# Allegro board KD_CH4_26_sli.brd
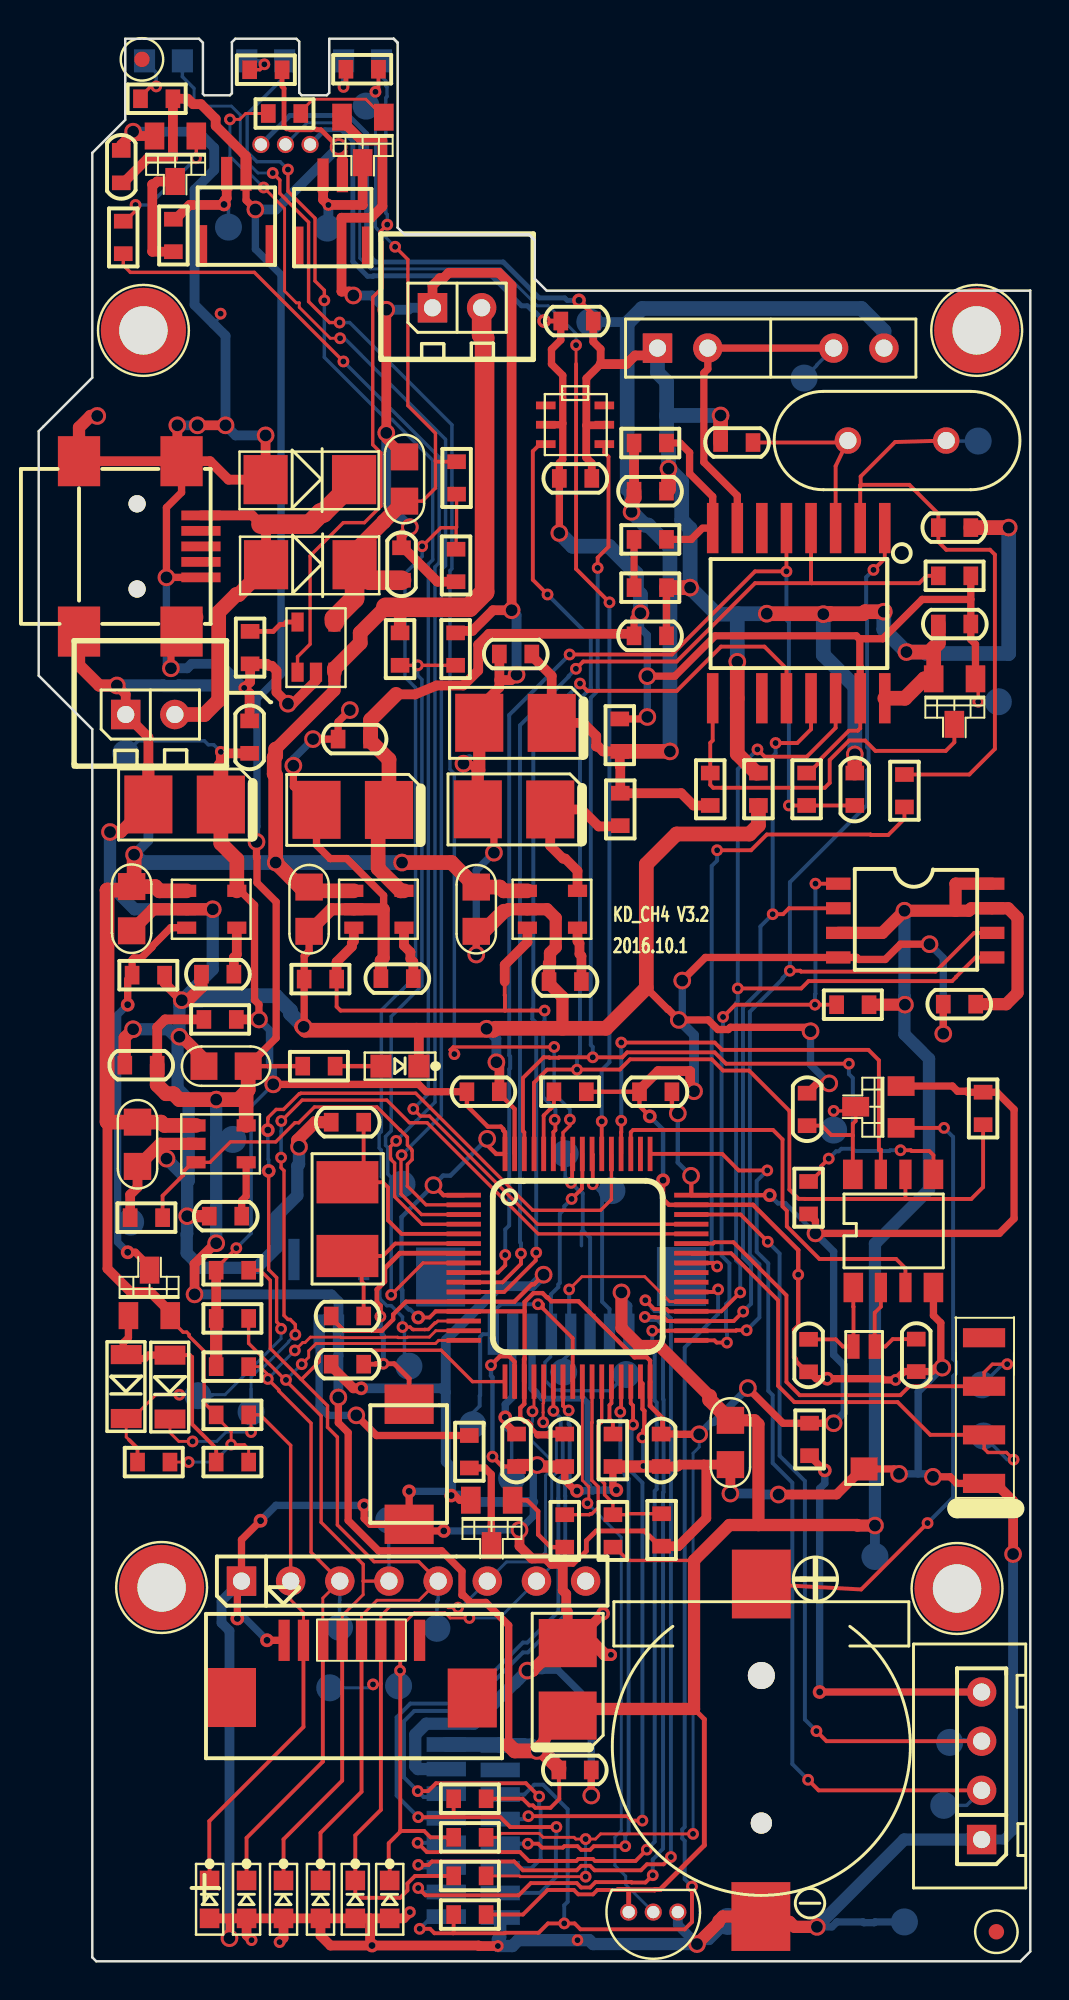
[diagram p0: board, top side]
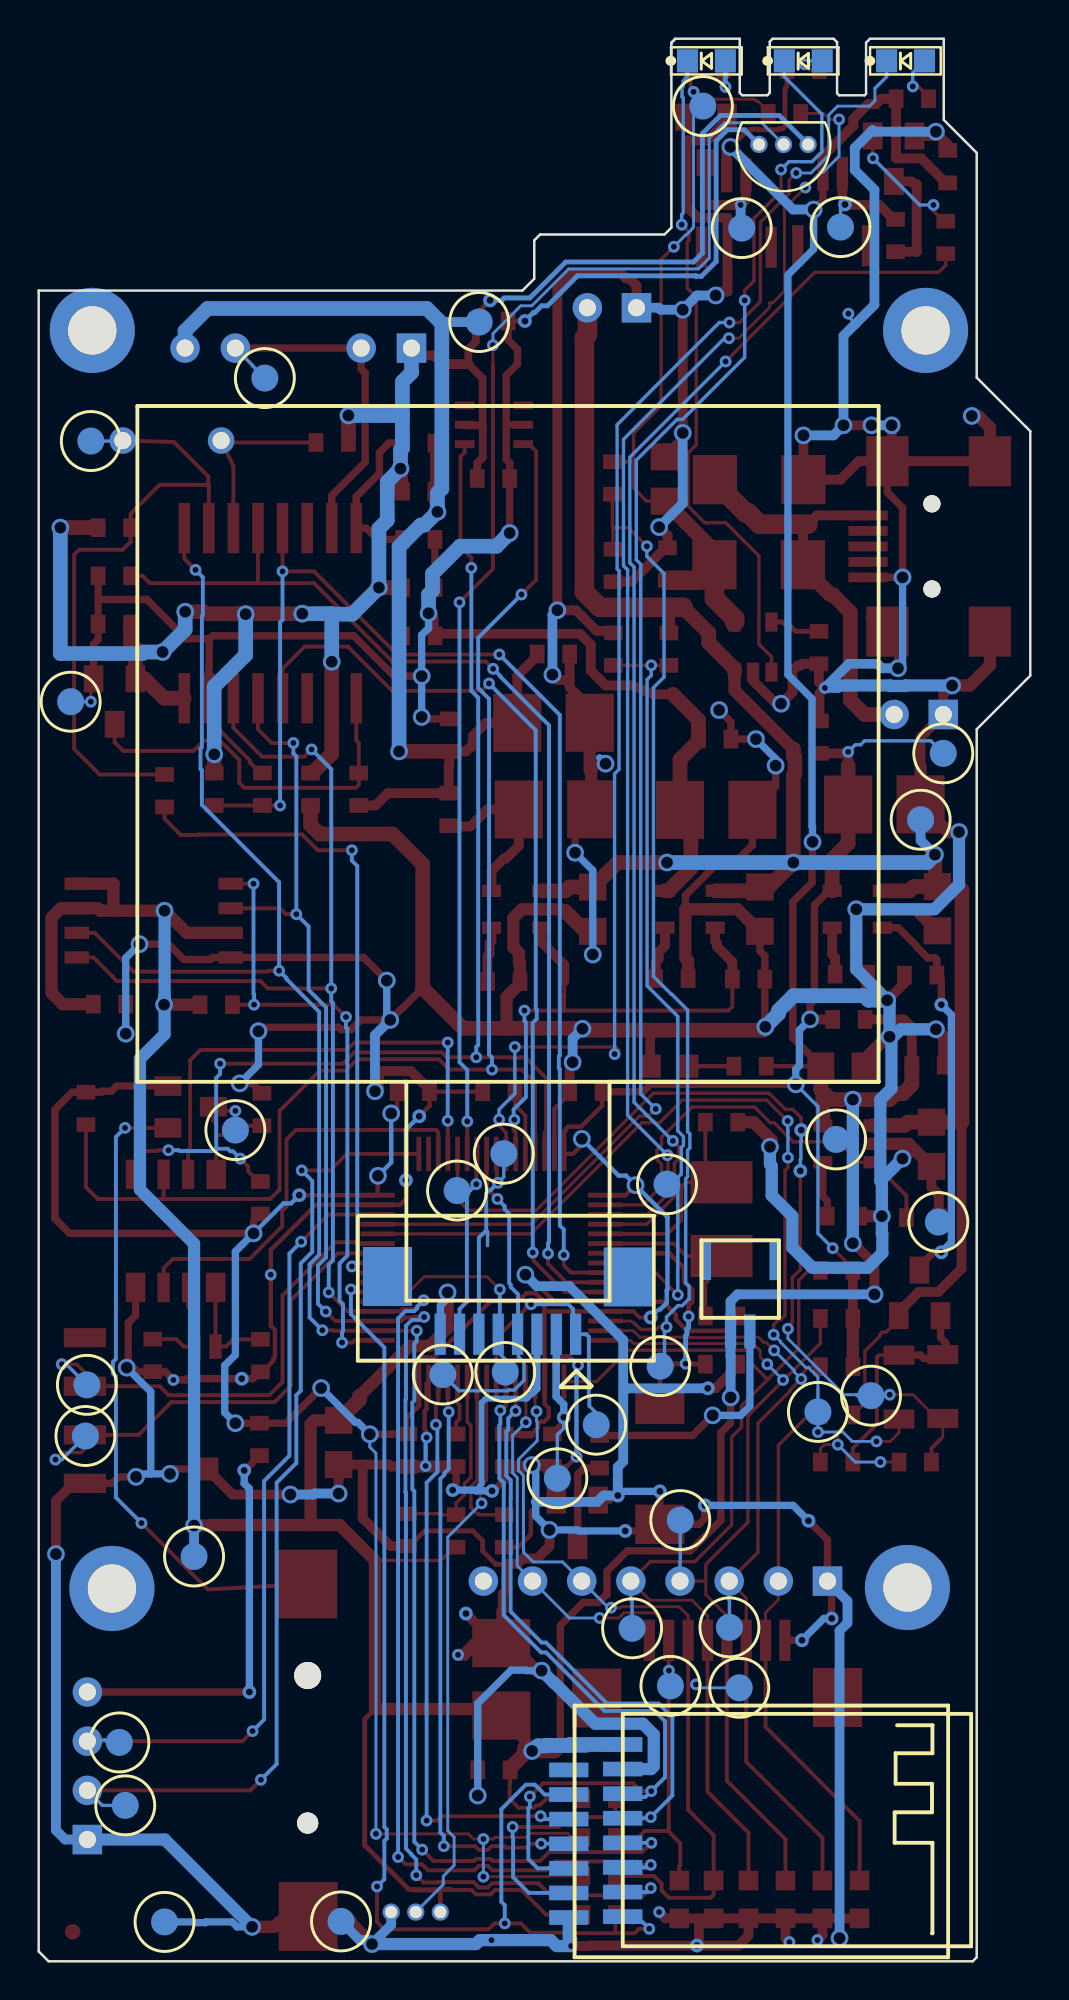
[diagram p1: board, bottom side, seen from below]

Outline 51.23 x 99.29 mm; copper layers: TOP, BOTTOM. Coordinates in mm from the lower left corner of the outline.
Outline path: 18.34,99.29 15.01,99.29 15.01,96.49 14.88,96.37 13.59,96.37 13.46,96.49 13.46,99.14 13.31,99.29 10.16,99.29 9.98,99.11 9.98,96.47 9.88,96.37 8.56,96.37 8.48,96.44 8.48,99.09 8.28,99.29 4.47,99.29 4.47,95.1 2.77,93.4 2.77,81.79 0,79.02 0,66.4 2.77,63.63 2.77,0.2 2.97,0 50.72,0 51.23,0.51 51.23,86.28 26.24,86.28 25.63,86.89 25.63,88.87 25.32,89.18 18.9,89.18 18.54,89.53 18.54,99.09 ; 18.34,99.29 18.54,99.09 ; 18.34,99.29 18.54,99.09

## Placement (name value [footprint] x y rotation side)
C2  0.1uF  [C0603]  18.75 72.16 270 top
C7  0.1uF  [C0603]  27.2 50.6 0 top
C16  10uF  [C0805]  22.61 54.33 270 top
C17  0.1uF  [C0603]  9.25 50.98 0 top
C20  0.1uF  [C0603]  9.65 38.48 0 top
C21  10uF  [C0805]  9.68 46.23 180 top
C22  10uF  [C0805]  5.11 42.19 270 top
C23  0.1uF  [C0603]  18.52 50.75 0 top
C25  10uF  [C0805]  13.97 54.33 270 top
C26  0.1uF  [C0603]  16.31 63.12 0 top
C27  0.1uF  [C0603]  10.9 63.22 270 top
C28  0.1uF  [C0603]  5.28 46.28 0 top
C29  0.1uF  [C0603]  47.32 69.06 0 top
C30  0.1uF  [C0603]  31.6 68.45 180 top
C31  NC/15pF  [C0603]  36.07 78.44 0 top
C32  NC/15pF  [C0603]  47.32 74.04 180 top
C33  0.1uF  [C0603]  42.16 60.53 270 top
C85  5pF  [C0603]  39.78 31.28 90 top
C86  5pF  [C0603]  45.34 31.29 90 top
C87  0.1uF  [C0603]  39.7 43.99 90 top
C88  15pF  [C0603]  15.95 43.33 0 top
C89  15pF  [C0603]  15.95 33.32 0 top
C90  0.1uF  [C0603]  15.95 30.84 0 top
C91  0.1uF  [C0603]  24.64 67.51 0 top
C92  10uF  [CAP-B]  24.52 59.48 0 top
C94  10uF  [C0805]  18.9 76.55 90 top
C95  10uF  [CAP-B]  16.18 59.46 0 top
C96  1uF  [C0603]  24.69 26.39 270 top
C97  10uF  [CAP-B]  7.5 59.73 0 top
C98  10uF  [CAP-B]  24.59 63.95 0 top
C99  10uF  [C0805]  4.8 54.36 270 top
C100  0.1uF  [C0603]  4.27 92.68 270 top
C101  10uF  [CAP-B]  27.32 14.6 270 top
C102  0.1uF  [C0603]  27.71 9.88 180 top
C103  0.1uF  [C0603]  27.18 26.39 270 top
C104  0.1uF  [C0603]  31.88 44.91 180 top
C105  0.1uF  [C0603]  32.16 26.39 270 top
C106  0.1uF  [C0603]  22.96 44.91 0 top
C107  0.1uF  [C0603]  47.57 49.43 180 top
C108  10uF  [C0805]  35.74 26.79 90 top
C109  0.1uF  [C0603]  27.74 76.58 180 top
C110  0.1uF  [C0603]  27.81 84.71 180 top
C111  0.1uF  [C0603]  31.6 75.92 180 top
D14  ESD5Z5VU  [SOD-523]  12.65 3.19 270 top
D22  MBR0520  [SOD-123]  4.52 29.68 90 top
D25  SMBJ5.0CA  [SMA]  14.01 76.52 180 top
D26  SS34  [SMA]  14.03 72.12 180 top
D27  BAT54C  [SOT23-3]  43.39 44.13 0 top
D30  ESD5Z5VU  [SOD-523]  10.74 3.19 270 top
D31  ESD5Z5VU  [SOD-523]  8.83 3.19 270 top
D32  ESD5Z5VU  [SOD-523]  14.56 3.19 270 top
D33  MBR0520  [SOD-123]  6.78 29.65 90 top
D34  ESD5Z5VU  [SOD-523]  16.36 3.19 270 top
D35  ESD5Z5VU  [SOD-523]  18.14 3.19 270 top
D_CHRG  LED  [LED0603]  17.86 98.15 90 bottom
D_LED1  LED  [LED0603]  7.58 98.15 90 bottom
D_LED2  LED  [LED0603]  12.86 98.15 90 bottom
D_PWR  LED  [LED0603]  19.79 46.23 270 top
FB1  FB/100M  [R0603]  30.05 59.49 90 top
FB2  FB/100M  [R0603]  37.19 60.53 90 top
H1  NC/mechanical _pad  [HOLE_2D5X4D5]  5.41 84.23 0 top
H2  NC/mechanical _pad  [HOLE_2D5X4D5]  47.45 19.25 0 top
H3  NC/mechanical _pad  [HOLE_2D5X4D5]  6.35 19.3 0 top
H4  NC/mechanical _pad  [HOLE_2D5X4D5]  48.46 84.23 0 top
H5  NC/mark  [MARK]  49.48 1.52 0 top
H6  NC/mark  [MARK]  5.33 98.22 0 top
JP_5V  -  [XH-2A]  4.5 64.39 0 top
JP_BAT1  -  [XH-2A]  20.35 85.39 0 top
JP_KEY  dpz_2d54_8p  [DPZ_2D54_8P]  10.48 19.63 0 top
JP_SEN  -  [MJC4]  37.82 83.31 0 top
JP_SWD  -  [XH-4A]  48.72 6.29 90 top
JS_BAT2  BAT  [CR1220_SOCKET_V1]  37.34 11.2 180 top
JS_BL  sh1d0_2p_smd_side  [SH1D0_2P_SMD_SIDE]  14.99 35.23 90 bottom
JS_BUZZER  sh1d0_2p_smd_side  [SH1D0_2P_SMD_SIDE]  15.19 89.53 270 top
JS_KEY  fpc_1d0_8p  [FPC_1D0_8P]  16.19 14.27 0 top
JS_LCD  FPC_1d0_8p  [DXDCG8448]  7.84 80.32 0 bottom
JS_MOTOR  sh1d0_2p_smd_side  [SH1D0_2P_SMD_SIDE]  10.21 89.61 270 top
JS_USART  NC/XH-4A  [HEADER4_SMD]  45.99 27.68 180 top
JS_USB  usb_mini_5p_smt  [USB_MINI_5P_SMT]  5.38 73.07 270 top
KS_REST  KEY_3x6x2d5_2p_SMD  [KEY_3X6X2D5_2P_SMD]  19.32 25.72 270 top
NOREF  -  []  39.67 48.31 0 top
Q1  CJ3407/PMOS  [SOT23-3]  5.73 34.51 270 top
Q10  AO3400A/NMOS  [SOT23-3]  7.05 93.1 90 top
Q11  AO3400A/NMOS  [SOT23-3]  16.74 94.07 90 top
Q12  AO3400A/NMOS  [SOT23-3]  23.39 22.64 90 top
R1  3.3K  [R0603]  16.71 97.71 0 top
R2  2K  [R0603]  10.92 67.84 90 top
R6  3.3K  [R0603]  14.48 46.23 0 top
R8  NC/0R  [R0603]  30.02 63.32 270 top
R9  0R  [R0603]  44.73 60.45 270 top
R10  3.3K  [R0603]  31.6 78.41 0 top
R11  0R  [R0603]  31.6 73.43 180 top
R12  3K  [R0603]  31.6 70.94 180 top
R13  10K  [R0603]  39.67 60.53 90 top
R14  33K  [R0603]  18.67 67.77 90 top
R15  33K  [R0603]  21.54 67.77 270 top
R16  10K  [R0603]  48.79 44.04 270 top
R17  10K  [R0603]  39.78 39.43 90 top
R18  10K  [R0603]  29.67 26.39 90 top
R35  10K  [R0603]  27.46 44.91 180 top
R36  10R  [R0603]  39.83 26.95 90 top
R37  33K  [R0603]  21.59 76.61 90 top
R38  33K  [R0603]  21.56 72.09 90 top
R122  10K  [R0603]  4.37 89.03 270 top
R123  10R  [R0603]  6.96 89.13 270 top
R124  10K  [R0603]  12.7 95.43 180 top
R125  3.3K  [R0603]  6.1 96.19 180 top
R126  3.3K  [R0603]  11.73 97.69 180 top
R203  10K  [R0603]  22.28 2.41 180 top
R206  10K  [R0603]  22.28 8.39 180 top
R207  10K  [R0603]  27.18 22.23 270 top
R208  100R  [R0603]  22.25 26.31 270 top
R209  10K  [R0603]  10.01 35.69 0 top
R210  10K  [R0603]  10.01 33.2 0 top
R211  10K  [R0603]  10.01 30.71 0 top
R212  10K  [R0603]  10.01 28.22 0 top
R213  10K  [R0603]  47.32 71.55 0 top
R214  10K  [R0603]  42.06 49.4 180 top
R215  0R  [R0603]  34.7 60.53 90 top
R216  10K  [R0603]  32.18 22.28 270 top
R217  NC/10K  [R0603]  29.67 22.23 90 top
R218  10K  [R0603]  5.56 38.4 0 top
R219  10K  [R0603]  14.55 50.72 0 top
R220  NC/0R  [R0603]  9.37 48.64 0 top
R221  10K  [R0603]  5.66 50.93 180 top
R222  10K  [R0603]  10.01 25.78 0 top
R223  10K  [R0603]  5.94 25.78 0 top
R224  10K  [R0603]  22.28 4.41 180 top
R225  10K  [R0603]  22.28 6.4 180 top
T1  NC/TEST  [TEST_55C_SMD]  16.92 95.81 180 bottom
T2  NC/TEST  [TEST_55C_SMD]  5.66 58.95 180 bottom
T3  NC/TEST  [TEST_55C_SMD]  28.47 84.66 180 bottom
T4  NC/TEST  [TEST_55C_SMD]  4.5 62.38 180 bottom
T5  NC/TEST  [TEST_55C_SMD]  49.58 65.05 180 bottom
T6  NC/TEST  [TEST_55C_SMD]  43.21 20.9 180 bottom
T7  NC/TEST  [TEST_55C_SMD]  4.75 38.18 180 bottom
T8  NC/TEST  [TEST_55C_SMD]  8.23 29.21 180 bottom
T9  NC/TEST  [TEST_55C_SMD]  18.77 40.13 180 bottom
T10  NC/TEST  [TEST_55C_SMD]  19.13 30.73 180 bottom
T11  NC/TEST  [TEST_55C_SMD]  46.76 8.05 180 bottom
T12  NC/TEST  [TEST_55C_SMD]  47.07 11.3 180 bottom
T13  NC/TEST  [TEST_55C_SMD]  44.73 2.03 180 bottom
T14  NC/TEST  [TEST_55C_SMD]  35.61 2.06 180 bottom
T15  NC/TEST  [TEST_55C_SMD]  48.82 27.13 180 bottom
T16  NC/TEST  [TEST_55C_SMD]  48.74 29.77 180 bottom
T17  NC/TEST  [TEST_55C_SMD]  39.55 81.76 180 bottom
T18  NC/TEST  [TEST_55C_SMD]  48.54 78.51 180 bottom
T19  NC/TEST  [TEST_55C_SMD]  20.57 17.2 180 bottom
T20  NC/TEST  [TEST_55C_SMD]  18.08 22.78 180 bottom
T21  NC/TEST  [TEST_55C_SMD]  15.54 17.25 180 bottom
T22  NC/TEST  [TEST_55C_SMD]  10.97 28.37 180 bottom
T23  NC/TEST  [TEST_55C_SMD]  9.8 89.56 180 bottom
T24  NC/TEST  [TEST_55C_SMD]  10.03 42.44 180 bottom
T25  NC/TEST  [TEST_55C_SMD]  14.91 89.51 180 bottom
T26  NC/TEST  [TEST_55C_SMD]  41.07 42.93 180 bottom
T27  NC/TEST  [TEST_55C_SMD]  22.43 27.71 180 bottom
T28  NC/TEST  [TEST_55C_SMD]  24.43 24.94 180 bottom
T29  NC/TEST  [TEST_55C_SMD]  30.35 30.3 180 bottom
T30  NC/TEST  [TEST_55C_SMD]  27.13 30.43 180 bottom
T31  NC/TEST  [TEST_55C_SMD]  27.2 41.71 180 bottom
T32  NC/TEST  [TEST_55C_SMD]  29.62 39.8 180 bottom
T33  NC/TEST  [TEST_55C_SMD]  15.04 14.12 180 bottom
T34  NC/TEST  [TEST_55C_SMD]  18.59 14.22 180 bottom
U1  TP4054-4.2  [SOT23-5]  14.33 67.87 0 top
U2  XC6219B282MR  [SOT23-5]  26.54 54.33 270 top
U4  RT9193-33GB  [SOT23-5]  8.94 54.33 270 top
U5  RT9193-33GB  [SOT23-5]  9.42 42.21 270 top
U15  PCF8563T  [SOP8]  42.24 35.05 0 top
U56  NC/REF3112AIDBZR  [SOT23-3]  47.31 65.06 90 top
U57  RT9193-33GB  [SOT23-5]  17.58 54.33 270 top
U58  STM32F103RB  [LQFP64]  27.84 35.82 0 top
U59  W25Q32SSIG  [SOIC_208MIL_8P]  45.29 53.75 0 top
U63  NC/SHT20  [SHT20]  27.72 79.41 0 top
U64  DS18B20  [TO92]  12.75 93.83 270 bottom
U67  AD7705  [SOIC16_WIDE]  39.27 69.62 270 top
U68  NC/DS18B20  [TO92]  31.75 2.54 270 top
U_24L01  NRF24L01 mode  [NRF24L01_MODE_V1]  21.06 12.78 270 bottom
U_ESP11  ESP8266-esp11  [ESP11]  23.55 13.21 270 bottom
Y1  8M  [CY5032_2P]  15.95 38.33 270 top
Y3  NC/2.4576M  [49S]  41.81 78.54 0 top
Y5  32.768KHz  [MC_146]  42.65 28.58 270 top

## Library data of the parts
C2 C7 C16 C17 C20-C23 C25-C33 C85-C92 C94-C111 = C
D14 D25 D26 D30-D32 D34 D35 = DIODE
D22 D33 = MBR0520
D27 = BAT54C
D_CHRG D_LED1 D_LED2 D_PWR = LED0603
FB1 FB2 = INDUCTOR_0
H1-H6 = PAD
JP_5V JP_BAT1 = BAT
JP_KEY = CON8
JP_SEN = CH4_Sensor_3
JP_SWD JS_USART = HEADER 4
JS_BAT2 = BATT
JS_BL = sh1d0_2p_smd_side_0
JS_BUZZER = buzzer_0
JS_KEY = CON8_0
JS_LCD = DXDCG8448
JS_MOTOR = MOTOR AC
JS_USB = MICRO_USB
KS_REST = SW PUSHBUTTON_0
Q1 = PMOS
Q10-Q12 = NMOS
R1 R2 R6 R8-R18 R35-R38 R122-R126 R203 R206-R225 = R
T1-T34 = TESTPONT
U1 = TP4054-4.2
U2 U4 U5 U57 = RT9193_1
U15 = PCF8563
U56 = REF31xx
U58 = STM32F103
U59 = W25Q32: Tolerance: ***; User Part Number: ***
U63 = SHT20
U64 U68 = DS18B20
U67 = AD7706_0
U_24L01 = NRF24L01_mode
U_ESP11 = 5962-9065001_0
Y1 Y3 = CRYSTAL
Y5 = MC_146

## Footprints (pads in the part's own frame, mm; a bottom-side part is the same pattern mirrored in y, then rotated)
49S
  round 1.372 hole 0.889: 1(0,0) 2(5.08,0)
C0603
  rect 0.762x0.965 smd: 1(-0.838,0) 2(0.838,0)
C0805
  rect 1.397x1.422 smd: 1(-1.143,0) 2(1.143,0)
CAP-B
  rect 2.489x2.997 smd: 1(1.913,0.005) 2(-1.831,0.01)
CR1220_SOCKET_V1
  round 1.397 hole 1.397 unplated: (0,-3.556)
  rect 3.048x3.556 smd: 1(0,-8.28) 2(0.025,8.89)
  round 1.092 hole 1.092: 3(0,4.064)
CY5032_2P
  rect 2.184x3.2 smd: 1(-1.905,0) 2(1.905,0)
DPZ_2D54_8P
  rect 1.524x1.524 hole 0.889: 1(0,0)
  round 1.524 hole 0.889: 2(2.54,0) 3(5.08,0) 4(7.62,0) 5(10.16,0) 6(12.7,0) 7(15.24,0) 8(17.78,0)
DXDCG8448
  rect 0.584x2.134 smd: 1(15.654,47.936) 2(16.654,47.936) 3(17.654,47.936) 4(18.654,47.936) 5(19.654,47.936) 6(20.654,47.936) 7(21.654,47.936) 8(22.654,47.936)
  rect 2.54x3.048 smd: 9(12.931,44.981) 10(25.375,44.956)
ESP11
  rect 0.762x2.032 smd: 1(2.055,-0.3) 2(3.325,-0.3) 3(4.595,-0.3) 4(5.865,-0.3) 5(7.135,-0.3) 6(8.405,-0.3) 7(9.675,-0.3) 8(10.945,-0.3)
FPC_1D0_8P
  rect 0.584x2.134 smd: 1(-3.515,2.306) 2(-2.515,2.306) 3(-1.515,2.306) 4(-0.515,2.306) 5(0.485,2.306) 6(1.485,2.306) 7(2.485,2.306) 8(3.485,2.306)
  rect 2.54x3.048 smd: 9(-6.238,-0.649) 10(6.206,-0.674)
HEADER4_SMD
  rect 2.184x0.991 smd: 1(-2.857,3) 2(-2.857,0.493) 3(-2.857,-2.017) 4(-2.857,-4.524)
HOLE_2D5X4D5
  round 4.4 hole 2.5: 1(0,0)
KEY_3X6X2D5_2P_SMD
  rect 2.032x2.54 smd: 1(-3.048,-0.178) 2(3.15,-0.178)
LED0603
  rect 1.194x1.092 smd: 1(0,-2.108) 2(0,-0.152)
LQFP64
  rect 1.778x0.254 smd: 1(-5.88,3.749) 2(-5.88,3.251) 3(-5.88,2.751) 4(-5.88,2.25) 5(-5.88,1.75) 6(-5.88,1.25) 7(-5.88,0.749) 8(-5.88,0.249) 9(-5.88,-0.249) 10(-5.88,-0.749) 11(-5.88,-1.25) 12(-5.88,-1.75) 13(-5.88,-2.25) 14(-5.88,-2.751) 15(-5.88,-3.251) 16(-5.88,-3.749) 33(5.88,-3.749) 34(5.88,-3.251) 35(5.88,-2.751) 36(5.88,-2.25) 37(5.88,-1.75) 38(5.88,-1.25) 39(5.88,-0.749) 40(5.88,-0.249) 41(5.88,0.249) 42(5.88,0.749) 43(5.88,1.25) 44(5.88,1.75) 45(5.88,2.25) 46(5.88,2.751) 47(5.88,3.251) 48(5.88,3.749)
  rect 0.254x1.778 smd: 17(-3.749,-5.88) 18(-3.251,-5.88) 19(-2.751,-5.88) 20(-2.25,-5.88) 21(-1.75,-5.88) 22(-1.25,-5.88) 23(-0.749,-5.88) 24(-0.249,-5.88) 25(0.249,-5.88) 26(0.749,-5.88) 27(1.25,-5.88) 28(1.75,-5.88) 29(2.25,-5.88) 30(2.751,-5.88) 31(3.251,-5.88) 32(3.749,-5.88) 49(3.749,5.88) 50(3.251,5.88) 51(2.751,5.88) 52(2.25,5.88) 53(1.75,5.88) 54(1.25,5.88) 55(0.749,5.88) 56(0.249,5.88) 57(-0.249,5.88) 58(-0.749,5.88) 59(-1.25,5.88) 60(-1.75,5.88) 61(-2.25,5.88) 62(-2.751,5.88) 63(-3.251,5.88) 64(-3.749,5.88)
MARK
  round 0.8 smd: 1(0,0)
MC_146
  rect 1.27x0.635 smd: 1(-3.173,0.55) 2(-3.173,-0.55)
  rect 1.194x1.397 smd: 3(3.15,0)
MJC4
  rect 1.524x1.524 hole 0.889: 1(-5.85,0)
  round 1.524 hole 0.889: 2(-3.25,0) 3(3.25,0) 4(5.85,0)
NRF24L01_MODE_V1
  rect 0.762x2.032 smd: 1(1.58,0) 2(2.85,0) 3(4.12,0) 4(5.39,0) 5(6.66,0) 6(7.93,0) 7(9.2,0) 8(10.47,0)
R0603
  rect 0.762x0.965 smd: 1(-0.838,0) 2(0.838,0)
SH1D0_2P_SMD_SIDE
  rect 2.134x0.584 smd: (1.013,1.798) (1.013,-1.801)
  rect 1.753x0.584 smd: 1(-2.7,-0.5) 2(-2.7,0.5)
SHT20
  rect 1.016x0.406 smd: 1(1.499,-1.06) 2(1.499,-0.06) 3(1.499,0.94) 4(-1.524,0.94) 5(-1.524,-0.06) 6(-1.524,-1.06)
SMA
  rect 2.286x2.54 smd: 1(2.286,0) 2(-2.286,0)
SOD-123
  rect 0.991x1.6 smd: 1(1.651,0) 2(-1.651,0)
SOD-523
  rect 1.016x1.016 smd: 1(0.978,0) 2(-0.978,0)
SOIC16_WIDE
  rect 2.6x0.6 smd: 1(-4.4,4.44) 2(-4.4,3.17) 3(-4.4,1.9) 4(-4.4,0.63) 5(-4.4,-0.64) 6(-4.4,-1.91) 7(-4.4,-3.18) 8(-4.4,-4.45) 9(4.388,-4.45) 10(4.388,-3.18) 11(4.388,-1.91) 12(4.388,-0.64) 13(4.388,0.63) 14(4.388,1.9) 15(4.388,3.17) 16(4.388,4.44)
SOIC_208MIL_8P
  rect 1.27x0.635 smd: 1(-3.975,1.905) 2(-3.975,0.635) 3(-3.975,-0.635) 4(-3.975,-1.905) 5(3.975,-1.905) 6(3.975,-0.635) 7(3.975,0.635) 8(3.975,1.905)
SOP8
  rect 1.016x1.524 smd: 1(-0.152,-0.254) 4(3.988,-0.254) 5(3.988,5.588) 8(-0.178,5.588)
  rect 0.635x1.524 smd: 2(1.27,-0.254) 3(2.54,-0.254) 6(2.54,5.588) 7(1.27,5.588)
SOT23-3
  rect 1.397x1.016 smd: 1(1.168,-1.092) 2(1.168,1.067) 3(-1.181,0)
SOT23-5
  rect 0.635x0.991 smd: 1(-0.953,-1.295) 2(0,-1.295) 3(0.953,-1.295) 4(0.953,1.295) 5(-0.953,1.295)
TEST_55C_SMD
  round 1.397 smd: 1(0,0)
TO92
  round 0.889 hole 0.635: 1(0,1.27) 2(0,0) 3(0,-1.27)
USB_MINI_5P_SMT
  round 0.889 hole 0.889 unplated: (-2.2,-0.3) (2.2,-0.3)
  rect 0.508x2.032 smd: 1(-1.6,3) 2(-0.8,3) 3(0,3) 4(0.8,3) 5(1.6,3)
  rect 2.591x2.184 smd: 6(-4.399,1.999) 7(-4.399,-3.3) 8(4.399,-3.3) 9(4.399,1.999)
XH-2A
  rect 1.524x1.524 hole 0.889: 1(0,0)
  round 1.524 hole 0.889: 2(2.54,0)
XH-4A
  rect 1.524x1.524 hole 0.889: 1(0,0)
  round 1.524 hole 0.889: 2(2.54,0) 3(5.08,0) 4(7.62,0)

## Nets
AGND: C29.1 C30.1 C31.1 C32.1 C33.1 C109.1 C110.1 C111.1 FB2.2 JP_SEN.1(4) R12.1 U56.2(GND) U63.2(VSS) U64.1(GND) U67.10(REF IN-) U67.16(GND)
AVDD_2V8: C91.2 C98.1 C111.2 FB1.2 JP_SEN.4(1) R8.2 R10.1 R215.1 T3.1
AVDD_3V3: C26.2 C29.2 C30.2 C95.1 C109.2 C110.2 R8.1 R13.2 R213.2 T5.1 U56.1(IN) U57.5(VOUT) U63.5(VDD) U64.3(VDD) U67.15(VDD)
GND: C2.1 C7.1 C16.2 C17.1 C20.1 C21.2 C22.2 C23.1 C25.2 C26.1 C27.1 C28.1 C85.1 C86.1 C87.2 C88.1 C89.1 C90.1 C91.1 C92.2 C94.2 C95.2 C96.2 C97.2 C98.2 C99.2 C100.1 C101.2 C102.1 C103.2 C104.2 C105.2 C106.2 C107.2 C108.1 D14.1 D25.1 D30.1 D31.1 D32.1 D34.1 D35.1 D_PWR.2(CATHODE) FB2.1 JP_5V.1(-) JP_BAT1.1(-) JP_KEY.1 JP_SWD.1 JS_BAT2.2(-) JS_KEY.1 JS_LCD.3(VSS) JS_USART.1 JS_USB.5(GND) JS_USB.6(NC1) JS_USB.7(NC2) JS_USB.8(NC3) JS_USB.9(NC4) KS_REST.2 Q10.2(SOURCE) Q11.2(SOURCE) Q12.2(SOURCE) R2.1 R15.1 R18.1 R35.1 R38.1 R216.2 R218.1 R219.1 R221.1 T13.1 T14.1 U1.2(GND) U2.2(GND) U4.2(GND) U5.2(GND) U15.4(VSS) U57.2(GND) U58.12(VSSA) U58.18(VSS_4) U58.31(VSS_1) U58.47(VSS_2) U58.63(VSS_3) U59.4(GND) U68.1(GND) U_24L01.2(GND) U_ESP11.8(GND) Y5.3(GND)
VBAT_CR1220: D27.1(C1) JS_BAT2.1(+)
VCC_5V: C2.2 C94.1 D26.2 R1.2 R37.2 T1.1 U1.4(VCC)
VCC_BAT: C16.1 C22.1 C25.1 C99.1 JP_BAT1.2(+) Q1.2(SOURCE) R14.2 R212.1 R222.2 R223.2 T2.1 U1.3(BAT) U2.1(VIN) U4.1(VIN) U5.1(VIN) U57.1(VIN)
VDD_2V8_CPU: C27.2 C97.1 C103.1 C104.1 C105.1 C106.1 D27.2(C2) R16.1 R17.1 R36.2 R209.1 R210.1 R211.1 R220.2 R224.1 R225.1 T4.1 U4.5(VOUT) U58.1(VBAT) U58.13(VDDA) U58.19(VDD_4) U58.32(VDD_1) U58.48(VDD_2) U58.64(VDD_3)
VDD_3V3: C21.1 C28.2 C100.2 C101.1 C102.2 C107.1 C108.2 JS_BL.2 JS_BUZZER.2(+) JS_LCD.8(VDD) JS_MOTOR.2 R6.1 R125.1 R126.1 R203.1 R206.1 R214.1 R217.1 R220.1 T6.1 T24.1 U5.5(VOUT) U59.3(W\P\(IO2)) U59.7(H\O\L\D\(IO3)) U59.8(VCC) U68.3(VDD) U_24L01.1(VDD) U_ESP11.1(VCC)
ADC_5V: R37.1 R38.2 T10.1 U58.14(PA0-WKUP/USART2_CTS/ADC12_IN0/T)
ADC_BATT: R14.1 R15.2 T9.1 U58.8(PC0/ADC12_IN10)
ADC_DRDY: U58.11(PC3/ADC12_IN13) U67.12(D\R\D\Y\)
ADC_MCLK_1MHZ: R9.2 U58.41(PA8/USART1_CK/TIM1_CH1/MCO)
ADC_RESET: C33.2 R13.1 U58.9(PC1/ADC12_IN11) U67.5(R\E\S\E\T\)
ADC_SPI_CLK: U58.34(PB13/TIM1_CH1N/SPI2_SCK) U59.6(CLK) U67.1(SCLK) U_24L01.5(SCK)
ADC_SPI_CS: R213.1 U58.10(PC2/ADC12_IN12) U67.4(C\S\)
ADC_SPI_DI: U58.36(PB15/TIM1_CH3N/SPI2_MOSI) U59.5(DI(IO0)) U67.14(DIN) U_24L01.6(MOSI)
ADC_SPI_DO: U58.35(PB14/TIM1_CH2N/SPI2_MISO) U59.2(DO(IO1)) U67.13(DOUT) U_24L01.7(MISO)
BOOT0: R35.2 U58.60(BOOT0)
BOOT1: R18.2 U58.28(PB2/BOOT1)
BUZZER: R124.2 U58.3(PC14-OSC32_IN)
DC_5V: D25.2 D26.1 JP_5V.2(+) JS_USB.1(VDD)
DS18B20: U58.54(PD2/TIM3_ETR) U64.2(DQ)
DS18B20_2: U58.25(PC5/ADC12_IN15) U68.2(DQ)
EN_AVDD: R219.2 U2.3(EN) U57.3(EN) U58.59(PB7/I2C1_SDA/USART1_RX)
EN_VDD_3V3: R218.2 U5.3(EN) U58.2(PC13-TAMPER-RTC)
EN_VDD_CPU: Q1.3(DRAIN) R221.2 T7.1 U4.3(EN)
EN_VDD_CPU_IO: D22.2(CATHODE) R223.1 T8.1 U58.53(PC12)
FLASH_CS: R214.2 U58.33(PB12/TIM1_BKIN/SPI2_NSS) U59.1(C\S\)
HARDVERSION: R216.1 R217.2 U58.27(PB1/ADC12_IN9/TIM3_CH4/TIM1_CH3)
KEY1: D31.2 D33.2(CATHODE) JP_KEY.2 JS_KEY.2 R212.2 T22.1 U58.44(PA11/USART1_CTS/CANRX/TIM1_CH4/)
KEY2: D30.2 JP_KEY.3 JS_KEY.3 R211.2 T21.1 U58.15(PA1/USART2_RTS/ADC12_IN1/TIM2_C)
KEY3: D14.2 JP_KEY.4 JS_KEY.4 R210.2 T20.1 U58.16(PA2/USART2_TX/ADC12_IN2/TIM2_CH)
KEY4: D32.2 JP_KEY.5 JS_KEY.5 R209.2 T19.1 U58.17(PA3/USART2_RX/ADC12_IN3/TIM2_CH)
KEY5: D34.2 JP_KEY.6 JS_KEY.6 R224.2 T33.1 U58.20(PA4/SPI1_NSS/USART2_CK/ADC12_IN)
KEY6: D35.2 JP_KEY.7 JS_KEY.7 R225.2 T34.1 U58.21(PA5/SPI1_SCK/ADC12_IN5)
LCD_A0: JS_LCD.5(A0) T30.1 U58.37(PC6/TIM3_CH1)
LCD_BL: R207.1 U58.26(PB0/ADC12_IN8/TIM3_CH3/TIM1_CH2)
LCD_BL_OD: JS_BL.1 R208.1
LCD_RST: JS_LCD.1(REST) T27.1 U58.24(PC4/ADC12_IN14)
LCD_SPI_CLK: JS_LCD.7(SCLK) T32.1 U58.55(PB3/JTDO/TRACESWO/TIM2_CH2/SPI1)
LCD_SPI_CS: JS_LCD.4(CSB) T29.1 U58.56(PB4/JNTRST/TIM3_CH1/SPI1_MISO)
LCD_SPI_MOSI: JS_LCD.6(SDA) T31.1 U58.57(PB5/I2C1_SMBAL/TIM3_CH2/SPI1_MO)
LED1: D_LED1.2(CATHODE) U58.58(PB6/I2C1_SCL/USART1_TX)
LED2: D_LED2.2(CATHODE) U58.45(PA12/USART1_RTS/CANTX/TIM1_ETR/)
MOTO: R122.2 U58.4(PC15-OSC32_OUT)
NRF24L01_CE: U58.23(PA7/SPI1_MOSI/ADC12_IN7/TIM3_CH) U_24L01.3(CE) U_ESP11.6(RST)
NRF24L01_CS: R206.2 U58.22(PA6/SPI1_MISO/ADC12_IN6/TIM3_CH) U_24L01.4(CSN) U_ESP11.7(EN)
NRF24L01_IRQ: R203.2 U58.38(PC7/TIM3_CH2) U_24L01.8(IRQ) U_ESP11.3(GPIO0)
RTC_CLKOUT: U15.7(CLKOUT) U58.52(PC11)
RTC_INT: U15.3(I\N\T\) U58.51(PC10)
SHT20_SCL: R16.2 U15.6(SCL) U58.61(PB8/I2C1_SCL/CANRX) U63.6(SCL)
SHT20_SDA: R17.2 U15.5(SDA) U58.62(PB9/I2C1_SDA/CANTX) U63.1(SDA)
STM32_REST: C90.2 KS_REST.1 U58.7(NRST)
SWCLK: JP_SWD.2 T11.1 U58.49(PA14/JTCK/SWCLK)
SWDIO: JP_SWD.3 T12.1 U58.46(PA13/JTMS/SWDIO)
USART1_RX_PA10: JS_USART.3 T16.1 U58.43(PA10/USART1_RX/TIM1_CH3)
USART1_TX_PA9: JS_USART.2 T15.1 U58.42(PA9/USART1_TX/TIM1_CH2)
VLCD: C96.1 JS_LCD.2(VLCD) T28.1
WIFI_RXD: U58.29(PB10/TIM2_CH3/USART3_TX) U_ESP11.5(RXD)
WIFI_TXD: U58.30(PB11/TIM2_CH4/USART3_RX) U_ESP11.4(TXD)
N13668: D_CHRG.1(ANODE) R1.1
N13684: D_CHRG.2(CATHODE) U1.1(\\C\H\R\G)
N13720: R2.2 U1.5(PROG)
N16097: C92.1 FB1.1 U2.5(VOUT)
N16179: C7.2 U2.4(BP)
N21796: C17.2 U4.4(BP)
N23154: C20.2 U5.4(BP)
N29933: C23.2 U57.4(BP)
N32414: R215.2 U56.3(OUT) U67.9(REF IN+)
N33068: C32.2 R9.1 T18.1 U67.2(MCLK IN) Y3.2
N33090: C31.2 U67.3(MCLK OUT) Y3.1
N33944: JP_SEN.2(3) JP_SEN.3(2) T17.1 U67.7(AIN1+)
N34260: R10.2 R11.1 U67.8(AIN1-)
N34981: R11.2 R12.2
N39350: C87.1 D27.3(A) T26.1 U15.8(VDD)
N39418: C85.2 U15.1(OSCI) Y5.2
N43336: C89.2 U58.6(PD1 OSC_OUT/CANTX) Y1.2
N43360: C88.2 U58.5(PD0 OSC_IN/CANRX) Y1.1
N60179: C86.2 U15.2(OSCO) Y5.1
N72942: Q10.1(GATE) R122.1
N75217: JS_BUZZER.1(-) Q11.3(DRAIN) T25.1
N75225: Q11.1(GATE) R124.1
N75805: D_LED1.1(ANODE) R125.2
N75841: D_LED2.1(ANODE) R126.2
N75877: D_PWR.1(ANODE) R6.2
N113896: Q12.1(GATE) R207.2
N120442: JP_SWD.4 R36.1
N162146: D22.1(ANODE) D33.1(ANODE) Q1.1(GATE) R222.1
N167009: JS_MOTOR.1 R123.1 T23.1
N729622: Q10.3(DRAIN) R123.2
N1078622: Q12.3(DRAIN) R208.2

Pads without a net: H1 1; H2 1; H3 1; H4 1; H5 1; H6 1; JP_KEY 8; JS_BAT2 3; JS_KEY 8 9 10; JS_LCD 9 10; JS_USART 4; JS_USB 2 3 4; U58 39 40 50; U63 3 4; U67 6 11; U_ESP11 2

## Via types
v1: diameter 0.61, hole 0.305, TOP to BOTTOM, 145 vias
v2: diameter 0.711, hole 0.356, TOP to BOTTOM, 27 vias
v3: diameter 0.914, hole 0.61, TOP to BOTTOM, 96 vias

## Routing (per net, layer and track width the routed paths; a pad name or vN(x,y) marks a point on that pad's centre or on a via; arc(x,y) is an arc through that point)
AGND: length 114.1
  TOP w0.203: 46.24,67.83 46.24,68.11 46.48,68.35
  TOP w0.254: C110.1 28.74,84.79 28.74,84.96 v2(27.91,85.78)
  TOP w0.381: R12.1 C30.1
  TOP w0.406: C109.1 28.57,77.37 28.29,77.66 28.29,79.32 28.3,79.33 ; 28.3,79.33 29.2,79.33 U63.2 ; 28.3,79.33 28.3,81.75 29.03,82.49 29.03,83.26 28.65,83.64 C110.1
  TOP w0.508: 29.03,82.49 30.37,82.49 30.81,82.93 31.59,82.93 JP_SEN.1
  TOP w0.762: v3(36.09,67.11) U67.10 36.09,62.36 37.08,61.37 FB2.2 ; 40.89,69.6 42.6,69.6 42.7,69.7 v3(43.66,69.7) ; 40.89,69.6 v3(37.62,69.6) ; 40.89,69.6 40.87,69.57 v3(40.54,69.57) ; C29.1 46.48,68.07 46.24,67.83 ; v3(35.23,79.83) C31.1 ; R12.1 v3(33.66,70.94) ; U67.16 44.76,65.23 45.76,66.23 U56.2 46.24,67.83 ; v3(44.83,67.61) 46.02,67.61 46.24,67.83 ; C32.1 v3(50.11,74.04) ; v3(32.54,77.09) 32.54,77.09 32.54,76.02 C111.1 ; C33.1 v3(42.16,62.33)
  BOTTOM w0.254: v2(27.91,85.78) 27.3,85.78 27.18,85.9 25.86,85.9 24,87.76 17.4,87.76 16.94,88.21 16.94,94.39 16,95.33 12.98,95.33 U64.1
  BOTTOM w0.762: 36.09,69.57 36.12,69.6 v3(37.62,69.6) ; 36.09,69.57 35.03,69.57 v3(33.66,70.94) 33.66,73.99 33.22,74.42 33.22,76.41 v3(32.54,77.09) 32.54,78.05 32.44,78.15 32.44,79.83 ; 36.09,69.57 v3(36.09,67.11) ; v3(50.11,74.04) 50.11,67.55 50.11,67.54 45.87,67.54 45.8,67.61 v3(44.83,67.61) 43.66,68.78 v3(43.66,69.7) ; JP_SEN.1 31.97,82.04 32.44,81.57 32.44,79.83 ; v3(42.16,62.33) 42.16,65.84 40.54,67.46 v3(40.54,69.57) ; v3(35.23,79.83) 32.44,79.83
AVDD_2V8: length 61.7
  TOP w0.508: C91.2 25.48,67.41 26.5,66.38 C98.1 28.13,63.96 28.8,63.28 28.8,62.74 28.81,62.74 28.91,62.74 29.16,62.48 R8.2 30.02,61.72 30.05,61.7 FB1.2 33.2,60.33 33.83,59.69 R215.1 ; C111.2 R10.1
  TOP w0.762: C111.2 30.76,75.59 30.63,75.28 v3(30.63,74.85) ; R8.2 v3(32.61,62.48)
  BOTTOM w0.508: T3.1 30.33,84.66 30.4,84.58
  BOTTOM w0.762: JP_SEN.4 43.67,84.19 42.51,85.36 31.18,85.36 30.4,84.58 30.4,76.05 30.63,75.82 v3(30.63,74.85) 31.31,74.17 31.49,74.17 32.61,73.05 v3(32.61,62.48)
AVDD_3V3: length 109.5
  TOP w0.178: U56.1 48.54,66.09 v1(48.54,65.05)
  TOP w0.203: R13.2 39.78,61.37 40.32,61.91 40.32,62.01 41.86,63.55 42.32,63.55 42.44,63.68 U67.15
  TOP w0.254: C110.2 v2(26.11,84.71)
  TOP w0.381: U56.1 48.4,68.02 48.16,68.26 C29.2 48.16,70.33 ; U67.15 42.44,66.85 42.42,66.86 42.42,68.27 ; 42.42,68.27 42.46,68.3 43.61,68.3 45.64,70.33 48.16,70.33 ; 42.42,68.27 42.24,68.45 34.95,68.45 32.87,66.37 v3(31.45,66.37) ; 48.16,70.33 R213.2 ; v3(31.45,64.26) 31.34,64.16 R8.1 ; 30.76,68.55 30.76,69.37 31.01,69.62 v3(31.09,69.62) ; 27.08,79.43 27.08,81.9 26.49,82.49 26.49,83.25 26.97,83.73 C110.2 ; 27.08,79.43 27,79.35 U63.5 ; 27.08,79.43 27.08,77.56 26.9,77.38 C109.2 v3(26.9,73.76)
  TOP w0.508: C30.2 30.76,68.55 23.27,68.55 22.71,68 22.71,66.66 21.94,65.89 20.56,65.89 19.45,65.43 18.47,65.43
  TOP w0.762: 18.47,65.43 17.14,64.11 C26.2 17.14,63.02 18.1,62.06 C95.1 17.54,58.9 17.54,56.44 18.69,55.28 U57.5
  BOTTOM w0.178: T5.1 v1(48.54,65.05)
  BOTTOM w0.254: v2(26.11,84.71) 25.68,85.14 25.6,85.14 25.25,85.5 24.94,85.5 23.39,87.05 17.3,87.05 17.27,87.02 16.99,87.02 16.23,87.78 16.23,94.01 15.65,94.59 14.78,94.59 U64.3
  BOTTOM w0.381: v3(31.09,69.62) 31.09,68.85 31.45,68.49 v3(31.45,66.37) v3(31.45,64.26)
  BOTTOM w0.762: v3(26.9,73.76) 27.58,73.08 29.46,73.08 30.89,71.65 30.89,70.79 31.09,70.59 v3(31.09,69.62)
GND: length 695.4
  TOP w0.229: C89.1 15.11,33.22 15.77,32.56 17.73,32.56 18.31,33.15 18.31,33.4 18.98,34.07 U58.12 24.58,34.07 25.48,34.96 25.59,34.96 v3(26.09,35.46) ; R35.1 C104.2 31.04,44.17 v2(31.57,43.64) ; v1(31.19,27.05) 31.23,27.05 31.23,27.05 31.23,27.42 31.29,27.48 31.29,28.42 31.19,28.52 31.19,29.83 U58.31 ; v1(23.44,26.06) 23.95,25.55 C96.2 ; v2(32.26,40.34) 32.26,39.37 32.56,39.07 U58.47 36.91,39.07 39.24,36.73 v1(39.24,35.46) 39.24,32.83 39.03,32.61 39.03,31.19 39.12,31.1 39.12,30.99 39.67,30.44 C85.1 ; U58.63 24.59,44.02 23.8,44.81 C106.2 ; C105.2 32.13,25.58 v1(31.24,25.58) ; U58.18 24.59,30.96 24.31,31.24 23.83,31.24 v1(23.37,30.78)
  TOP w0.254: R216.2 32.08,21.44 31.29,22.23 28.8,22.23 28.3,21.72 28.3,21.19 27.61,20.5 27.08,20.5
  TOP w0.381: R219.1 13.72,48.31 13.59,48.26 ; JS_USB.5 v3(6.6,71.47) 6.6,75.08 7.38,75.86 JS_USB.6 ; v2(20.93,22.23) 19.48,22.23 KS_REST.2 ; 13.72,50.76 13.72,51.92 13.97,52.18 C25.2 ; 9.86,2.22 v3(9.86,1.19) ; KS_REST.2 v2(19.14,24.27) ; KS_REST.2 17.12,22.57 16.81,22.87 v2(16.81,23.55) ; JS_USB.9 6.83,68.12 v3(6.83,66.78) ; 17.82,54.33 17.82,55.04 15.92,56.95 15.06,56.95 14.35,57.65 C95.2 13.16,60.66 v3(13.16,61.75) ; 31.39,50.27 32.5,49.16 32.52,49.16 v3(33.07,48.62) 34.59,48.62 35.09,48.12 35.63,48.12 35.74,48.23 39.67,48.23 v3(39.88,48.03) ; C107.2 v3(46.74,47.9) ; Y5.3 44.2,25.43 v3(44.45,25.17) ; 46.32,30.63 46.14,30.45 C86.1 44.7,30.45 v1(44.27,30.02) 43.65,30.02 43.59,30.09 v2(40.74,30.09) 40.17,30.09 39.81,30.44 C85.1 ; 46.32,30.63 46.34,30.66 v3(46.69,30.66) ; 46.32,30.63 46.61,30.63 46.61,30.64 46.61,32.97 46.23,33.35 U15.4 ; v3(21.95,61.85) 22.27,61.85 22.68,61.43 ; C87.2 40.21,45.34 v3(40.84,45.34) ; v2(11.46,22.75) 10.48,21.77 JP_KEY.1 10.26,19.42 v2(10.26,17.7) ; Q12.2 21.75,23.81 21.51,24.05 v2(21.31,24.05) ; v3(46.02,52.53) 44.53,52.53 43.74,51.74 42.37,51.74 42.27,51.84 U59.4 34.44,51.84 v3(33.25,50.65) ; C102.1 v3(28.55,8.56) ; R18.1 29.67,24.51 v2(29.84,24.33) ; v2(11.79,16.58) JS_KEY.1 ; v3(14.17,63.12) C26.1 15.47,64.01 v3(16.08,64.62) ; C103.2 27.18,24.84 27.76,24.26 27.84,24.26 27.84,24.29 v2(27.81,24.29) ; C16.2 v3(22.61,51.99) ; v3(46.2,25.02) 47.1,25.02 47.43,24.68 JS_USART.1 ; C92.2 23.52,58.65 v3(23.52,57.25)
  TOP w0.508: JS_USB.7 JS_USB.6 ; JS_USB.6 7.16,77.69 v3(7.16,79.32) ; JS_USB.6 8.85,77.47 9.81,76.52 D25.1 v3(11.72,78.8) ; Y5.3 42.55,25.43 41.22,24.1 v3(38.23,24.1) ; D31.1 D30.1 ; v3(50.34,21.03) 50.34,23.78 49.44,24.68 JS_USART.1 ; 17.12,2.22 D34.1 D32.1 ; 17.12,2.22 D35.1 18.85,2.22 v1(19.18,2.54) ; 17.12,2.22 17.12,0.91 v2(17.22,0.81) ; v1(23.72,0.79) 22.75,0.79 22.72,0.81 v2(17.22,0.81) ; C100.1 4.27,93.83 4.74,94.3 4.97,94.3 ; v1(12.45,0.99) 12.65,1.19 D14.1 ; 23.5,48.08 23.42,48.16 v3(23.14,48.16) ; C105.2 33.02,25.55 33.12,25.65 34.37,25.65 ; R218.1 4.72,39.59 5.11,39.97 C22.2 ; 5.67,61.69 5.67,63.22 JP_5V.1 4.5,65.43 v3(4.04,65.89) ; R15.1 21.64,68.71 22.4,68.71 23.47,69.77 v3(24.43,69.77) 24.43,86.54 23.77,87.2 21.18,87.2 20.9,86.92 20.73,86.92 20.35,86.54 JP_BAT1.1 ; v2(17.22,0.81) 15.07,0.81 14.56,1.33 D32.1 ; 23.8,66.17 23.8,65.79 22.76,64.75 C98.2 ; 23.8,66.17 C91.1 ; 23.8,66.17 24.41,66.17 v3(24.69,66.45) ; 19.53,48.08 19.64,47.97 D_PWR.2 ; v2(16.66,29.59) 16.26,29.59 15.11,30.73 C90.1 ; D30.1 10.74,1.35 v1(11,1.09) ; D30.1 D14.1 ; 34.37,25.65 C108.1 v3(35.74,24.16) ; 34.37,25.65 34.49,25.52 34.49,22.89 33.05,21.44 R216.2 ; D14.1 D32.1 ; C101.2 27.33,18.06 27.25,18.14 27.25,18.97 27.08,19.15 27.08,20.5 27.05,20.52 26.49,20.52 26.21,20.8 25.48,20.8 24.84,21.44 v3(24.84,22.28) ; v3(9.65,79.32) v3(8.2,79.32) ; v3(33.86,44.93) 33.66,45.14 33.66,45.97 33.65,45.97 32,45.97 31.04,45.01 C104.2 ; v3(17.96,85.29) v3(17.96,78.93) 17.96,78.63 C94.2 ; R221.1 6.5,50.52 v3(7.39,49.63) ; R38.1 20.6,71.25 18.85,73 C2.1 18.75,73.63 v3(19.18,74.07) ; 4.97,94.3 5,94.27 Q10.2 ; 4.97,94.3 4.97,94.48 4.96,94.49 v3(4.88,94.49) ; C27.1 10.9,65.48 v1(10.62,65.76) 10.92,66.07 R2.1 11.79,67.01 11.89,66.9 12.04,66.9 12.29,66.66 12.29,65.54 v3(12.88,64.95) 13.14,64.95 14.33,66.14 U1.2 ; v3(23.65,46.43) 23.8,46.28 C106.2 ; R219.1 13.72,50.76 ; v3(16.26,86.03) 16.05,86.23 15.65,86.23 15.65,86.24 15.65,90.04 15.65,90.04 17.17,90.04 17.75,90.63 17.75,94.03 17.75,94.03 16.69,94.03 15.67,95.05 Q11.2 ; 27.63,16.43 v2(29.16,17.96)
  TOP w0.635: C22.2 5.12,41.05 6.28,42.21 ; v3(7.27,47.75) 7.4,47.75 8.54,46.61 C21.2 ; C92.2 22.68,61.43 22.76,61.51 C98.2 ; C25.2 13.98,53.19 15.12,54.33 U57.2 17.82,54.33 17.82,51.82 17.68,51.68 C23.1 ; JS_USB.8 2.08,66.93 3.13,65.89 v3(4.04,65.89) ; 6.28,42.21 6.28,41.77 v3(6.6,41.45) ; 6.28,42.21 U5.2 ; C28.1 4.45,47.7 v3(4.88,48.13) ; v3(3.68,58.32) 4.24,58.32 C97.2 5.67,61.69 ; C103.2 25.83,25.55 v3(25.76,25.63) 24.77,25.63 C96.2 ; C17.1 8.41,50.32 7.72,49.63 v3(7.39,49.63) ; C99.2 5.91,54.33 U4.2 v3(8.99,54.33) ; v1(29.57,15.82) 29.26,15.82 28.65,16.43 C101.2 26.93,16.43 25.53,15.03 25.53,15.02 25.53,15.01 v3(25.25,15.01) ; 24.03,54.23 24.16,54.23 24.26,54.33 U2.2 26.26,54.33 26.71,53.88 26.71,52.37 26.42,52.07 26.42,51.57 26.37,51.52 C7.1 26.37,50.5 27.06,49.8 27.06,48.18 ; R18.1 C105.2 ; v3(3.02,79.81) 2.68,79.81 2.08,79.21 JS_USB.7 ; v3(7.67,38.48) C20.1 ; v3(13.45,42.06) 13.45,42.18 13.36,42.27 13.36,42.41 14.29,43.33 C88.1 ; v3(40.21,1.78) 39.05,1.78 38.8,2.03 JS_BAT2.2 35.34,2.31 35.13,2.1 35.13,2.01 v3(34.01,0.89)
  TOP w0.762: 24.03,54.23 22.99,53.19 C16.2 ; FB2.1 37.19,58.67 36.73,58.22 32.95,58.22 31.39,56.66 31.39,50.27 29.31,48.18 23.6,48.18 23.5,48.08 13.77,48.08 13.59,48.26 v3(13.69,48.26) ; 8.13,69.42 JS_USB.9
  BOTTOM w0.152: v1(9.4,85.09) 9.4,84.94 9.03,84.57
  BOTTOM w0.229: v2(32.26,40.34) 32.26,42.95 v2(31.57,43.64) ; v1(23.44,26.06) 23.44,30.16 23.37,30.24 v1(23.37,30.78) ; v1(31.24,25.58) 31.24,27 v1(31.19,27.05)
  BOTTOM w0.305: 28.62,24.3 28.44,24.47 28.44,24.55 28.35,24.65 28.35,28.85 28.14,29.06 26.01,29.06 25.7,29.36
  BOTTOM w0.381: v2(10.26,17.7) 10.67,17.7 v2(11.79,16.58) ; 22.25,62.15 v3(21.95,61.85) ; v3(25.76,25.63) 25.55,25.43 25.55,22.99 v3(24.84,22.28) 23.39,22.28 23.34,22.23 v2(20.93,22.23) ; v3(40.21,1.78) 40.98,1.78 41.24,2.03 42.59,2.03 42.63,1.99 43.17,1.99 43.21,2.03 T13.1 ; JS_LCD.3 25.49,29.58 25.7,29.36 ; v3(22.61,51.99) 22.61,56.34 v3(23.52,57.25) ; v3(33.07,48.62) 33.25,48.79 v3(33.25,50.65) ; v3(39.88,48.03) 39.88,46.3 v3(40.84,45.34) ; v3(6.6,71.47) 6.6,67.01 v3(6.83,66.78) ; v3(46.02,52.53) 46.74,51.82 v3(46.74,47.9) ; v2(19.14,24.27) 21.09,24.27 v2(21.31,24.05) ; v3(46.69,30.66) 45.44,29.41 45.44,25.17 ; 45.44,25.17 v3(44.45,25.17) ; 45.44,25.17 46.05,25.17 v3(46.2,25.02) ; v3(28.55,8.56) 28.55,13.31 26.83,15.03 26.04,15.03 26.02,15.01 v3(25.25,15.01) ; v3(14.17,63.12) 13.16,62.1 v3(13.16,61.75) ; v2(27.81,24.29) 27.84,24.29 27.84,24.26 28.04,24.26 28.08,24.3 28.62,24.3 28.62,24.29 28.66,24.33 v2(29.84,24.33) ; v2(11.46,22.75) 12.26,23.55 v2(16.81,23.55)
  BOTTOM w0.508: v3(19.18,74.07) 17.96,75.29 v3(17.96,78.93) ; v3(11.72,78.8) 10.17,78.8 v3(9.65,79.32) 9.65,83.95 8.05,85.55 8.05,91.49 9.07,92.51 9.07,93.65 8.16,94.56 8.15,94.56 8.08,94.49 v3(4.88,94.49) ; 21.03,29.39 21.03,32.08 23.82,34.87 25.49,34.87 v3(26.09,35.46) ; 21.03,29.39 21.03,25.81 21.31,25.53 v2(21.31,24.05) 22.05,24.05 22.38,23.72 25.55,23.72 ; 21.03,29.39 20.83,29.59 v2(16.66,29.59) ; U68.1 33.02,1.88 v3(34.01,0.89) 34.21,1.09 34.65,1.09 T14.1 ; v3(6.83,66.78) 7.67,66.78 7.9,67.01 9.37,67.01 v1(10.62,65.76) 9.93,65.76 9.8,65.89 ; v3(16.26,86.03) 17.22,86.03 v3(17.96,85.29) 19.1,85.29 19.2,85.39 JP_BAT1.1 ; v3(50.34,21.03) 50.34,6.77 49.86,6.29 JP_SWD.1 ; JP_KEY.1 9.45,18.6 9.45,17.48 9.86,17.07 v3(9.86,1.19) ; v3(35.74,24.16) 36.98,24.16 37.03,24.1 v3(38.23,24.1) ; v3(8.2,79.32) v3(7.16,79.32) ; v3(24.43,69.77) 24.69,69.52 v3(24.69,66.45) ; v3(23.65,46.43) 23.65,47.65 v3(23.14,48.16) ; v3(33.86,44.93) 33.86,47.83 v3(33.07,48.62)
  BOTTOM w0.635: 7.75,40.31 7.75,44.5 7.18,45.07 7.18,47.65 ; 7.75,40.31 v3(6.6,41.45) ; 7.75,40.31 7.67,40.23 v3(7.67,38.48) 7.67,37.58 7.65,37.55 7.65,36.58 8.41,35.81 11.25,35.81 12.29,36.86 12.29,38.48 13.36,39.55 13.36,41.07 13.45,41.16 v3(13.45,42.06) ; JP_SWD.1 44.72,6.29 v3(40.21,1.78) ; v3(3.68,58.32) 3.68,55.6 4.95,54.33 v3(8.99,54.33) 8.99,51.23 v3(7.39,49.63) 7.39,49.49 7.27,49.37 v3(7.27,47.75) 7.18,47.65 ; U_24L01.2 19.6,9.93 19.46,10.07 19.46,11.71 20.02,12.27 22.48,12.27 24.58,14.37 24.61,14.37 v3(25.25,15.01) ; v3(4.88,48.13) 6.69,48.13 7.18,47.65 ; v3(34.01,0.89) 28.64,0.89 28.44,1.09 v1(27.84,1.09) 24.78,1.09 24.47,0.79 v1(23.72,0.79) 23.72,1.13 23.85,1.25 U_ESP11.8 ; v3(4.04,65.89) 6.43,65.89 6.45,65.86 7.21,65.86 7.24,65.89 9.8,65.89
  BOTTOM w0.762: v3(7.39,49.63) 8.36,49.63 8.59,49.87 12.24,49.87 13.01,49.09 13.01,48.94 v3(13.69,48.26)
VBAT_CR1220: length 33.5
  TOP w0.203: JS_BAT2.1 42.49,19.2 v1(45.92,22.63) ; D27.1 v1(46.77,43.04)
  BOTTOM w0.203: v1(45.92,22.63) 47.24,23.95 47.24,30.21 47.4,30.36 47.4,30.95 47.24,31.1 47.24,42.57 v1(46.77,43.04)
VCC_5V: length 37.4
  TOP w0.178: v1(18.41,88.54) 19.08,87.88 19.08,80.34 20.5,78.92 20.5,76.08 19.82,75.41 C94.1
  TOP w0.203: R37.2 20.52,77.44 20.5,77.47 ; v1(17.4,96.55) 17.55,96.7 R1.2
  TOP w0.762: C94.1 18.88,75.41 17.83,74.35 17.83,74.34 16.32,72.83 D26.2
  TOP w1.016: C2.2 17.12,71.32 D26.2 16.32,70.38 15.28,69.34 U1.4
  BOTTOM w0.152: v1(17.4,96.55) 17.4,89.56 17.48,89.48 17.48,89.46 17.78,89.15 17.81,89.15 v1(18.41,88.54)
  BOTTOM w0.254: T1.1 16.92,96.06 v1(17.4,96.55)
VCC_BAT: length 112.8
  TOP w0.152: R212.1 9.17,28.12 9.94,27.34 v1(9.94,26.68) 10.63,26.68 10.85,26.47 R222.2 ; R223.2 v1(7.75,25.78)
  TOP w0.178: Q1.2 6.79,33.15 7.46,32.49 7.65,32.49 7.77,32.37 7.77,32.28 8.55,31.51 8.55,28.84 R212.1
  TOP w0.508: 3.55,43.34 3.55,35.77 4.75,34.57 5.76,34.57 6.79,33.53 Q1.2
  TOP w0.635: R14.2 18.67,69.9 18.69,69.93 ; 12.25,62.6 15.28,65.63 U1.3
  TOP w0.762: 17.93,69.93 16.61,68.61 16.61,68.08 15.28,66.75 U1.3 ; v3(4.93,57.15) 4.93,55.63 C99.1 ; U4.1 6.24,55.28 6.02,55.5 C99.1 ; C99.1 4.62,55.32 3.54,55.32 3.53,55.31 3.53,43.36 3.55,43.34 C22.1 6.32,43.34 6.49,43.17 U5.1 ; 12.25,62.6 12.24,62.6 12.24,62.26 12.17,62.18 12.17,61.32 12.24,61.24 v3(12.24,56.74) 13.51,55.48 C25.1 14.16,55.28 U57.1 ; U2.1 24.02,55.28 23.83,55.48 C16.1 22.59,55.48 21.33,56.74 v3(18.77,56.74)
  TOP w1.016: JP_BAT1.2 22.89,84 23.04,83.85 23.04,70.71 22.25,69.93 17.93,69.93
  BOTTOM w0.152: v1(9.94,26.68) 9.04,25.78 v1(7.75,25.78)
  BOTTOM w0.508: T2.1 5.66,57.89 v3(4.93,57.15)
  BOTTOM w0.762: v3(4.93,57.15) 5.33,56.74 v3(12.24,56.74) v3(18.77,56.74)
VDD_2V8_CPU: length 195.3
  TOP w0.152: R225.1 23.7,6.4 23.9,6.6 25.86,6.6 26.06,6.4 27.66,6.4 27.75,6.31 v1(28.26,6.31) 28.77,6.31 29.03,6.58 v1(33.81,6.58) ; R224.1 24.84,4.41 24.88,4.37 v1(28.26,4.37)
  TOP w0.178: R209.1 9.17,35.79 v1(10.21,36.83)
  TOP w0.203: 20.51,33.56 20.19,33.25 v2(19.61,33.25)
  TOP w0.229: 25.78,27.2 25.44,27.54 25.44,27.72 25.28,27.88 25.11,27.88 24.88,28.1 24.88,28.58 25.09,28.78 U58.19 ; v3(33.71,40.56) 33.72,40.55 U58.48 v2(37.77,39.56) ; C104.1 32.72,44.09 v3(33.02,43.79) ; 25.1,33.56 25.1,34.05 25.56,34.5 26.03,34.5 26.25,34.29 26.28,34.29 26.49,34.09 27.89,34.09 30.78,31.19 31.42,31.19 31.59,31.02 U58.32 ; 25.1,33.56 U58.13 20.51,33.56 ; 25.1,33.56 25.1,31.12 ; v3(23.17,42.47) 23.17,42.16 23.63,41.7 U58.64 24.09,42.83 24,42.91 24,42.98 23.88,43.1 23.2,43.1 22.12,44.18 C106.1 ; v3(20.4,40.08) 20.91,39.56 U58.1
  TOP w0.254: U58.19 25.09,31.1 25.1,31.12 ; U58.32 31.59,28.69 32.23,28.04 32.23,27.3 C105.1
  TOP w0.381: U4.5 10.41,55.28 11.15,54.55 11.15,49.64 11.38,49.42 v3(11.38,48.64) ; R17.1 40.13,38.24 v3(40.13,37.59) 49.63,37.59 50.39,38.35 50.39,43.99 49.5,44.88 R16.1 47.99,44.88 47.94,44.93 47.47,44.93 47.21,45.2 D27.2 ; C106.1 20.01,44.91 19.63,45.29 v3(12.12,45.29) ; v3(36.64,29.6) 38.46,27.79 R36.2 v3(41.07,27.79) ; 25.78,27.2 25.79,27.19 26.33,27.19 26.37,27.23 C103.1 ; v3(34.12,27.22) 32.97,27.22 32.96,27.23 C105.1
  TOP w0.508: R210.1 R209.1 ; R220.2 v3(11.38,48.64) ; 9.41,61.75 v1(9.41,62.46) 9.49,62.38 C27.2
  TOP w0.635: R210.1 R211.1
  TOP w0.762: U4.5 10.24,56.91 9.41,57.73 C97.1 9.41,61.75
  BOTTOM w0.152: v1(28.26,4.37) v1(28.26,6.31) ; v3(34.12,27.22) 34.12,26.56 33.81,26.24 v1(33.81,6.58)
  BOTTOM w0.178: v1(9.41,62.46) 9.04,62.83 8.76,62.83 8.56,63.03 5.14,63.03 T4.1 ; v3(12.12,45.29) 10.97,44.15 10.97,37.59 v1(10.21,36.83)
  BOTTOM w0.203: v2(19.61,33.25) 19.2,33.66 19.12,33.66
  BOTTOM w0.229: 19.12,33.66 18.78,34 18.78,34.65 18.75,34.69 18.75,38.43 v3(20.4,40.08) 20.89,40.58 21.27,40.58 v3(23.17,42.47) ; v2(37.77,39.56) 38.19,39.14 38.58,39.14 v3(40.13,37.59) ; v3(33.71,40.56) 33.02,41.25 v3(33.02,43.79)
  BOTTOM w0.381: v3(12.12,45.29) 12.12,46.06 11.93,46.25 11.93,48.09 v3(11.38,48.64) ; v3(41.07,27.79) 41.62,28.34 41.62,30.77 41.07,31.32 41.07,36.65 v3(40.13,37.59) ; v3(36.64,29.6) 34.86,27.83 34.74,27.83 v3(34.12,27.22)
VDD_3V3: length 282.7
  TOP w0.178: R217.1 29.77,21.39 30.45,20.7 33.86,20.7
  TOP w0.203: C102.2 26.87,9.17 26.9,9.14 26.9,8.38 26.44,7.92 25.66,7.92 25.53,8.05 25.35,8.05 25.01,8.39 R206.1 ; 29.92,3.71 29.9,3.68 28.86,3.68 28.64,3.45 27.88,3.45 27.65,3.68 26.29,3.68 25.02,2.41 R203.1 ; 31.85,3.71 30.45,3.71
  TOP w0.229: R6.1 C21.1
  TOP w0.254: U68.3 30.48,3.68 ; 30.48,3.68 31.82,3.68 31.85,3.71 32.11,3.71 34.39,5.99 34.39,12.5 33.86,13.03 ; 30.48,3.68 30.45,3.71 29.92,3.71 ; 15.49,93.68 14.58,94.59 14.38,94.59 14.35,94.61 14.1,94.61 14.07,94.59 13,94.59 12.95,94.64 12.81,94.64 12.67,94.77 12.67,96.72 12.57,96.82 R126.1
  TOP w0.381: v3(11.2,90.47) 10.71,90.95 JS_MOTOR.2 ; 24.28,11.18 24.28,17.35 23.1,18.53 22.31,18.53 21.93,18.91 21.87,18.91 21.87,20.14 20.82,21.2 17.56,21.2 15.99,22.77 15.99,27.3 15.48,27.81 v3(15.48,29.12) ; C21.1 10.82,46.24 12.27,47.68 12.27,54.71 11.28,55.7 11.28,57.01 11.25,57.04 v3(11.25,57.81)
  TOP w0.508: JS_BUZZER.2 15.69,93.48 15.49,93.68 v3(15.49,93.7) ; v3(8.05,34.44) 8.05,36.01 9.13,37.08 v3(9.17,37.08) ; C28.2 6.12,48.23 6.53,48.64 R220.1 ; JS_MOTOR.2 10.71,93.22 9.14,94.79 9.14,95.15 8.38,95.91 7.98,95.91 7.7,96.19 R125.1 6.93,93.11 5.63,93.11 4.37,91.85 C100.2
  TOP w0.635: 47.37,54.25 48.06,54.25 48.18,54.38 U59.7 50.09,54.38 50.57,53.9 50.57,50.01 49.99,49.43 C107.1 ; 47.37,54.25 v3(44.73,54.25) 43.59,53.11 U59.3 ; 47.37,54.25 47.37,55.65 47.38,55.65 U59.8 ; C108.2 36.99,27.94 37.19,27.74 37.19,22.53 ; 37.19,22.53 42.28,22.53 42.3,22.5 v3(43.21,22.5) ; 37.19,22.53 35.69,22.53 33.86,20.7 33.86,13.03 27.33,13.03 27.25,12.95 26.76,12.95 26,11.13 ; 34.67,29.18 32.07,31.78 31.04,31.78 30.11,32.7 v3(30.11,34.54) ; R214.1 v3(44.75,49.4)
  TOP w0.762: C28.2 6.12,45.26 6.58,44.81 6.96,44.81 7.26,44.5 v3(9.17,44.5) 10.32,44.5 10.72,44.9 ; U5.5 10.72,44.9 ; 10.72,44.9 10.82,45.01 C21.1 ; 27.25,12.95 27.25,12.76 C101.1 ; C108.2 35.73,27.94 34.67,28.99 34.67,29.18 ; C102.2 26.87,9.98 26.13,10.72 26.13,11 26,11.13 v3(25.74,10.86) 24.6,10.86 24.28,11.18
  BOTTOM w0.178: T24.1 9.19,42.44 9.17,42.47
  BOTTOM w0.381: JS_LCD.8 30.48,32.39 30.48,33.86 30.11,34.23 v3(30.11,34.54) ; v3(11.2,90.47) 11.2,88.42 12.52,87.1 12.52,66.45 11.28,65.2 11.28,58.61 11.25,58.59 v3(11.25,57.81)
  BOTTOM w0.508: T6.1 v3(43.21,22.5) ; v3(15.48,29.12) 15.48,31.27 15.49,31.27 JS_BL.2 15.49,34.08 15.13,34.44 v3(8.05,34.44) ; v3(15.49,93.7) 12.26,90.47 v3(11.2,90.47)
  BOTTOM w0.635: v3(9.17,37.08) v3(9.17,44.5) ; v3(44.73,54.25) 44.73,49.81 ; 44.73,49.81 44.73,47.88 46,46.61 46,39.85 43.21,37.06 v3(43.21,22.5) ; 44.73,49.81 44.75,49.78 v3(44.75,49.4)
  BOTTOM w0.762: U_24L01.1 23.8,11.2 U_ESP11.1 25.01,11.15 25.02,11.14 25.02,11.13 25.03,11.13 25.44,11.13 25.71,10.86 v3(25.74,10.86)
ADC_5V: length 53.3
  TOP w0.152: 20.47,32.97 20.52,32.97 20.62,33.06 U58.14
  TOP w0.178: v1(18.8,32.75) 19.19,32.75 19.31,32.63 19.37,32.63 19.37,32.63 19.95,32.63 19.95,32.63 20.13,32.63 20.47,32.97 ; v1(19.81,73.08) 20.77,74.04 21.56,74.04 ; 21.56,74.04 R38.2 ; 21.56,74.04 21.59,74.06 R37.1 ; U58.14 22.17,33.06
  BOTTOM w0.178: v1(19.81,73.08) 19.81,72.56 18.92,71.67 18.92,66.32 19.47,65.77 19.47,50.86 18.54,49.94 18.52,49.94 17.7,49.12 17.7,42.84 17.59,42.73 17.59,42 17.7,41.89 17.7,40.52 17.81,40.42 17.81,35.03 17.63,34.85 17.63,34.24 17.65,34.21 17.65,34.19 17.98,33.86 18.21,33.86 18.8,33.28 v1(18.8,32.75) 18.9,32.65 18.9,30.96 T10.1
ADC_BATT: length 41.5
  TOP w0.178: R14.1 v1(19.58,66.93) R15.2 ; U58.8 19.86,36.06 v1(18.21,34.42)
  BOTTOM w0.178: 18.21,40.48 18.03,40.66 18.03,42.03 17.92,42.14 17.92,42.59 18.21,42.89 18.21,48.79 19.8,50.38 19.8,66.19 19.58,66.41 v1(19.58,66.93) ; 18.21,40.48 v1(18.21,34.42) ; 18.21,40.48 18.56,40.13 T9.1
ADC_DRDY: length 49.1
  TOP w0.203: U58.11 24.05,34.57 25.68,36.2 25.68,36.6 25.68,36.6 v1(25.7,36.6) ; U67.12 38.63,66.76 37.5,67.89 35.26,67.89 32.97,65.61 28.34,65.61 v1(27.97,65.99)
  BOTTOM w0.203: v1(25.7,36.6) 25.7,48.46 25.5,48.67 25.5,49.17 25.55,49.23 25.55,63.58 v1(27.97,65.99)
ADC_MCLK_1MHZ: length 34.2
  TOP w0.203: R9.2 44.73,59 43.89,58.17 43,58.17 42.98,58.19 37.62,58.19 36.8,57.38 v1(35.05,57.38) ; v1(35.05,35.88) 35.05,35.85 34.84,36.06 U58.41
  BOTTOM w0.203: v1(35.05,57.38) 35.05,56.85 34.77,56.57 34.77,36.16 v1(35.05,35.88)
ADC_RESET: length 66
  TOP w0.203: v1(27.43,67.49) 32.72,67.49 37.01,71.78 v1(38.63,71.78) U67.5 ; v1(38.76,59.69) R13.1 C33.2 ; U58.9 23.73,35.57 24.1,35.94 v1(24.1,36.47)
  BOTTOM w0.203: v1(38.76,59.69) 38.76,69.15 38.63,69.28 v1(38.63,71.78) ; v1(24.1,36.47) 24.1,37.8 24.31,38 24.31,46.08 24.36,46.13 24.36,46.74 24.31,46.79 24.31,64.36 v1(27.43,67.49)
ADC_SPI_CLK: length 102.2
  TOP w0.203: U67.1 43.71,72.44 v1(43.13,71.86) ; v1(31.42,5.77) 30.84,5.18 28.74,5.18 28.64,5.28 27.88,5.28 27.78,5.18 25.32,5.18 24.87,5.64 20.06,5.64 v1(19.58,6.12) ; v1(36.58,32.59) 36.04,32.59 36.02,32.56 U58.34 32.54,32.56 32.54,32.56 v1(31.7,32.56) ; U59.6 48.34,53.11 46.33,51.11 39.39,51.11 39.34,51.16 v1(38.81,51.16)
  BOTTOM w0.203: v1(31.42,5.77) 31.83,6.17 31.83,24.28 31.93,24.38 31.93,28.85 31.83,28.96 31.83,31.9 31.7,32.03 v1(31.7,32.56) ; v1(36.58,32.59) 37.24,33.25 37.24,36 36.74,36.49 36.74,49.04 38.43,50.73 38.43,50.78 v1(38.81,51.16) 38.81,55.73 42.8,59.72 42.8,61.5 42.88,61.58 42.88,62.63 42.8,62.7 42.8,69.47 42.75,69.52 42.75,71.48 v1(43.13,71.86) ; U_24L01.5 v1(19.58,6.12)
ADC_SPI_CS: length 58.9
  TOP w0.203: 39.94,71.17 37.01,71.17 32.96,67.13 28.13,67.13 v1(27.76,66.75) ; 39.94,71.17 45.49,71.17 45.87,71.55 R213.1 ; 39.94,71.17 39.9,71.21 U67.4 ; v1(24.92,36.55) 24.92,36.02 23.97,35.07 U58.10
  BOTTOM w0.203: v1(27.76,66.75) 27.38,66.37 27.38,66.34 24.87,63.83 24.87,37.13 24.92,37.08 v1(24.92,36.55)
ADC_SPI_DI: length 99.2
  TOP w0.203: v1(37.13,62.59) 37.51,62.21 39.68,62.21 41.17,63.7 U67.14 ; v1(36.25,34.54) 35.27,33.56 U58.36 32.55,33.56 32.44,33.68 31.8,33.68 v1(31.34,34.14) ; v1(32.66,5.38) 32.29,5.01 31.42,5.01 31.11,4.7 28.72,4.7 28.49,4.93 28.03,4.93 27.8,4.7 25.02,4.7 24.56,5.16 20.32,5.16 20.14,4.98 v1(19.61,4.98) ; v1(36.12,50.24) 39.4,50.24 39.78,50.62 47.19,50.62 47.4,50.83 47.4,50.84 48.4,51.84 U59.5
  BOTTOM w0.203: v1(37.13,62.59) 36.12,61.57 v1(36.12,50.24) 36.12,49.58 36.03,49.49 36.03,36.2 36.25,35.98 v1(36.25,34.54) ; v1(19.61,4.98) 19.71,4.98 19.84,4.85 U_24L01.6 ; v1(32.66,5.38) 32.66,33.2 32.28,33.58 31.83,33.58 31.67,33.73 31.67,33.81 v1(31.34,34.14)
ADC_SPI_DO: length 87.3
  TOP w0.203: v1(19.61,3.78) 19.99,3.41 24.79,3.41 25.43,4.04 27.8,4.04 28.03,3.81 28.49,3.81 28.77,4.09 30.61,4.09 30.63,4.07 31.35,4.07 v1(31.72,4.45) ; v1(31.32,33.27) 31.85,33.27 31.88,33.25 32.31,33.25 32.49,33.06 U58.35 35.91,33.06 v1(36.4,33.55) ; v1(38.07,62.92) 39.19,62.92 39.9,63.63 U67.13 ; U59.2 38.76,54.38 38.46,54.08 v1(37.92,54.08)
  BOTTOM w0.203: v1(36.4,33.55) 36.8,33.96 36.8,35.93 36.39,36.34 36.39,49.26 37.29,50.16 37.29,53.44 v1(37.92,54.08) 37.92,62.23 38.07,62.38 v1(38.07,62.92) ; v1(31.32,33.27) 31.34,33.27 31.34,33.27 31.37,33.27 31.52,33.12 31.95,33.12 32.26,32.82 32.26,29.03 32.28,29.01 32.28,24.23 32.26,24.21 32.26,5.82 31.98,5.54 31.98,5.51 31.72,5.26 v1(31.72,4.45) ; v1(19.61,3.78) 19.68,3.78 19.68,3.78 19.68,3.66 19.77,3.58 U_24L01.7
BOOT0: length 3.4
  TOP w0.203: U58.60 26.09,43.67 26.1,43.68 26.1,43.69 26.43,44.02 26.44,44.02 26.62,44.2 R35.2
BOOT1: length 2.8
  TOP w0.203: R18.2 29.67,27.84 29.49,28.02 29.49,28.72 29.59,28.82 U58.28
BUZZER: length 67.5
  TOP w0.152: v1(15.57,83.82) 15.06,83.82 13.46,85.42 13.46,85.65 13.46,85.65 13.31,85.65 12.7,86.25 12.7,90.52 v1(11.62,91.61) ; R124.2 10.69,95.43 10.39,95.12 v1(9.88,95.12)
  TOP w0.178: v1(18.75,41.63) 18.72,41.63 18.72,39.62 19.78,38.57 U58.3
  BOTTOM w0.152: v1(11.62,91.61) 10.82,92.41 10.69,92.41 9.88,93.22 v1(9.88,95.12)
  BOTTOM w0.178: v1(15.57,83.82) 15.8,83.82 21.02,78.6 21.02,72.07 20.8,71.86 20.8,43.69 v1(18.75,41.63)
DC_5V: length 22
  TOP w0.508: D26.1 11.75,73.77 11.48,74.04 11.48,74.22 11.03,74.67 JS_USB.1
  TOP w0.762: D26.1 11.75,72 10.34,70.58 10.21,70.58 9.3,69.67 9.3,65.13 8.56,64.39 JP_5V.2
  TOP w1.016: D25.2 16.29,76.39 14.7,74.8 14.58,74.8 14,74.22 11.48,74.22
DS18B20: length 66.9
  TOP w0.152: v1(27.76,83.47) 27.76,82.49
  TOP w0.203: 27.76,82.49 27.76,71.91 v1(29.49,70.18) ; U58.54 v1(29.09,43.38)
  BOTTOM w0.152: U64.2 13.87,94.95 15.79,94.95 16.59,94.15 16.59,87.96 17.14,87.4 23.85,87.4 25.76,85.5 26.32,85.5 27.76,84.06 v1(27.76,83.47)
  BOTTOM w0.203: v1(29.49,70.18) 29.49,46.43 29.09,46.03 v1(29.09,43.38)
DS18B20_2: length 29.2
  TOP w0.152: v1(28.35,23.65) 28.42,23.72 28.42,24.5 28.39,24.53 28.39,24.53 28.09,24.84 U58.25
  BOTTOM w0.152: v1(28.35,23.65) 30.1,21.9 30.1,6.74 29.77,6.41 29.77,4.95 30.33,4.39 30.33,3.96 U68.2
EN_AVDD: length 27.9
  TOP w0.203: 24.08,50.6 24.08,49.89 24.09,49.87 24.09,49.1 ; 24.09,49.1 15.6,49.1 15.39,49.3 R219.2 15.39,50.75 ; 24.09,49.1 v1(26.14,49.1) ; v1(26.66,43.46) 26.7,43.46 26.7,42.93 26.59,42.82 U58.59
  TOP w0.508: 15.39,50.75 15.39,51.61 16.18,52.4 16.18,52.58 16.28,52.68 U57.3 ; U2.3 25.25,52.63 24.08,51.46 24.08,50.6
  BOTTOM w0.203: v1(26.66,43.46) 26.7,43.46 26.7,43.99 26.06,44.63 26.06,48.49 26.14,48.56 v1(26.14,49.1)
EN_VDD_3V3: length 22.5
  TOP w0.178: U5.3 8.85,41.26 9.91,42.32 12.25,42.32 13.23,43.3 13.43,43.3 14.25,44.12 17.48,44.12 18.68,42.91 18.69,42.91 19.01,42.59 19.01,42.58 19.05,42.55 19.05,42.15 19.27,41.93 19.27,41.89 19.29,41.86 19.29,41.41 19.05,41.16 19.05,40.03 20.01,39.07 U58.2
  TOP w0.203: 6.4,38.38 R218.2 6.4,39.54 7.47,40.61 7.47,40.78 7.95,41.26 U5.3
EN_VDD_CPU: length 21.5
  TOP w0.381: U4.3 6.82,53.38 5.85,52.41 5.85,52.38 5.29,51.82 4.91,51.82 4.83,51.73 R221.2 4.6,50.7 v2(4.6,49.4) ; Q1.3 5.73,35.88 5,36.62 v2(4.6,36.62)
  BOTTOM w0.178: T7.1 4.2,38.18 4.08,38.05
  BOTTOM w0.381: v2(4.6,36.62) 4.08,37.14 4.08,48.88 v2(4.6,49.4)
EN_VDD_CPU_IO: length 48.1
  TOP w0.152: 4.67,26.92 4.52,27.08 D22.2 4.83,28.03 6.06,29.26 v1(7.26,29.26)
  TOP w0.178: v2(11.88,40.82) 11.88,35.72 12.29,35.31 12.29,33.02 12.5,32.82 12.5,32.67 12.5,32.66 v1(12.52,32.66) ; v2(11.84,42.93) 11.84,43.5 11.86,43.52 11.86,43.58 12.27,43.99 12.65,43.99 13.46,44.81 13.51,44.81 13.54,44.83 19.48,44.83 25.52,38.79 29.03,38.79 29.59,39.34 U58.53
  TOP w0.203: R223.1 5.11,26.49 4.67,26.92
  BOTTOM w0.152: v1(7.26,29.26) 9.63,29.26 12.52,32.16 v1(12.52,32.66)
  BOTTOM w0.178: T8.1 8.94,29.21 8.99,29.26 ; v2(11.84,42.93) 11.84,42.35 11.86,42.34 11.86,41.42 11.88,41.39 v2(11.88,40.82)
FLASH_CS: length 32.6
  TOP w0.203: U59.1 v1(40.13,55.65) ; U58.33 34.91,32.07 35.03,31.95 v1(35.56,31.95) ; v1(35.36,48.77) 35.99,49.4 v1(40.11,49.4) R214.2
  BOTTOM w0.203: v1(35.56,31.95) 35.56,32.49 35.51,32.54 35.51,33.93 35.69,34.11 35.69,36.04 35.28,36.44 35.28,48.16 35.36,48.23 v1(35.36,48.77) ; v1(40.13,55.65) 40.13,49.96 40.11,49.94 v1(40.11,49.4)
HARDVERSION: length 9.8
  TOP w0.178: R216.1 30.42,23.11 30.37,23.06 R217.2 29.67,23.66 29.24,24.09 29.24,24.66 28.91,24.99 28.91,27.67 29.09,27.86 U58.27
KEY1: length 75.8
  TOP w0.152: v1(10.97,27.33) 10.97,28.09 R212.2 ; D33.2 6.78,27.3 7.24,26.85 v1(7.95,26.85) ; JP_KEY.2 13.02,18.67 13.68,18.01 JS_KEY.2
  TOP w0.178: v1(12.53,43.4) 13.61,44.48 17.98,44.48 19.15,43.31 20.07,43.31 25.81,37.57 U58.44 ; R212.2 11.44,28.22 13.02,26.64 JP_KEY.2 ; v1(13.26,32.36) 13.26,32.88 12.99,33.15 12.88,33.15 12.67,33.35 12.67,40.83 12.52,40.98 v1(12.52,41.5)
  TOP w0.203: JS_KEY.2 13.68,12.1 8.81,7.24 8.81,4.92 8.83,4.91 D31.2
  BOTTOM w0.152: 10.97,29.54 10.97,30.17 11.46,30.66 11.59,30.66 12.9,31.97 12.9,32 v1(13.26,32.36) ; v1(7.95,26.85) 9.19,26.85 9.68,27.33 v1(10.97,27.33) T22.1
  BOTTOM w0.178: T22.1 10.97,29.54 ; v1(12.53,43.4) 12.53,42.88 12.52,42.86 v1(12.52,41.5)
KEY2: length 44.5
  TOP w0.152: U58.15 20.51,32.56 20.18,32.23 19.05,32.23 19.02,32.21 18.57,32.21 18.54,32.23 17.91,32.23 17.88,32.21 15.62,32.21 15.6,32.23 14.04,32.23 13.76,31.95 13.64,31.95 v1(13.23,31.55) ; JS_KEY.3 14.68,18.76 JP_KEY.3 ; v1(11.84,30.07) 11.79,30.12 11.79,30.35 11.43,30.71 R211.2
  TOP w0.178: v1(11.84,30.07) 12.41,29.5 12.41,29.45 14.07,27.79 14.07,21.12 JP_KEY.3
  TOP w0.203: JS_KEY.3 14.68,10.31 10.74,6.37 D30.2
  BOTTOM w0.152: v1(13.23,31.55) 12.2,30.51 12.2,30.43 v1(11.84,30.07)
  BOTTOM w0.178: T21.1 15.54,18.64 15.56,18.66 JP_KEY.3
KEY3: length 48
  TOP w0.152: v1(13.59,30.84) 13.95,31.19 13.95,31.53 14.33,31.9 20.5,31.9 20.66,32.07 U58.16 ; JS_KEY.4 15.68,17.85 16.76,18.93 16.76,19.63 ; v1(12.78,30.02) 12.8,30.02 12.8,29.96
  TOP w0.178: JP_KEY.4 16.76,19.63 16.76,20.5 14.59,22.67 14.59,28.17 10.85,31.91 R210.2
  TOP w0.203: JS_KEY.4 15.68,9.33 12.65,6.3 D14.2
  BOTTOM w0.152: v1(13.59,30.84) v1(12.78,30.02)
  BOTTOM w0.178: T20.1 18.08,20.62 18.1,20.61 JP_KEY.4
KEY4: length 55.6
  TOP w0.152: JP_KEY.5 19.65,18.64 17.48,18.64 16.68,17.85 JS_KEY.5
  TOP w0.178: JP_KEY.5 19.63,20.64 17.33,20.64 15.43,22.54 15.43,27.07 14.92,27.58 14.92,28.69 13.53,30.09 ; 13.53,30.09 13.61,30.09 14.49,30.96 14.49,31.42 14.63,31.56 20.79,31.56 22.41,29.94 U58.17 ; 13.53,30.09 11.96,31.65 11.96,35.17 11.44,35.69 R209.2
  TOP w0.203: JS_KEY.5 16.68,8.75 14.56,6.63 D32.2
  BOTTOM w0.178: JP_KEY.5 20.64,18.66 20.57,18.59 T19.1
KEY5: length 42.8
  TOP w0.152: v1(17.27,14.3) 17.65,14.3 17.68,14.33 ; JS_KEY.6 17.68,17.85 18.15,18.31 21.11,18.31 21.16,18.26 v1(21.67,18.26) ; U58.20 25.59,28.48 v1(25.51,28.4)
  TOP w0.203: R224.2 19.44,4.41 19.05,4.02 19.05,3.66 18.67,3.28 16.59,3.28 16.59,3.28 16.51,3.28 16.36,3.44 D34.2 16.36,6.5 17.68,7.82 JS_KEY.6
  BOTTOM w0.152: v1(25.51,28.4) 25.51,27.89 25.48,27.86 25.48,26.88 26.44,25.91 26.44,25.34 26.19,25.09 26.19,21.13 25.68,20.62 24.17,20.62 JP_KEY.6 21.81,18.26 v1(21.67,18.26) ; v1(17.27,14.3) 17.09,14.12 T33.1
